# EAGLE board blinkmusb_b0_qfn (EAGLE 5.11)

Size 12.7 x 15.24 mm. Coordinates in mm from the lower left corner, seen from the top.
Outline: 0,0 12.7,0 12.7,15.24 0,15.24 0,0
Copper layers (1*16): Top 0.0356mm / dielectric 1.5011mm / Bottom 0.0356mm
Design rules "LaenPCBOrder *": minimum track width 8mil, minimum drill 13mil, track to track 6mil, track to pad 8mil, pad to pad 8mil, via to via 8mil, smd to smd 6mil, copper to edge 15mil, drill to drill 8mil, minimum pad ring 7mil, minimum via ring 7mil, stop-mask expansion 4mil, vias tented up to drill 0mil, thermal gap 10mil

## Footprints (pad centres in the part's own frame; a part is rotated, then mirrored left to right if it is on the bottom)
C0603 = smd 1.1 x 1: 1 -0.85,0; 2 0.85,0
SOD-323 = smd 0.63 x 0.83: 1 -1.15,0; 2 1.15,0
0603 = smd 1.1 x 1: 1 -0.85,0; 2 0.85,0
MLF20 = smd 0.9 x 0.35: 1 -2.25,1.3; 2 -2.25,0.65; 3 -2.25,0; 4 -2.25,-0.65; 5 -2.25,-1.3; 11 2.25,-1.3; 12 2.25,-0.65; 13 2.25,0; 14 2.25,0.65; 15 2.25,1.3 | smd 0.35 x 0.9: 6 -1.3,-2.25; 7 -0.65,-2.25; 8 0,-2.25; 9 0.65,-2.25; 10 1.3,-2.25; 16 1.3,2.25; 17 0.65,2.25; 18 0,2.25; 19 -0.65,2.25; 20 -1.3,2.25
RGBLED5050 = smd 2 x 1.1: 1 -2,1.7; 2 -2,0; 3 -2,-1.7; 4 2,-1.7; 5 2,0; 6 2,1.7
R0603 = smd 1 x 1.1: 1 -0.85,0; 2 0.85,0
MOLEX_480371000 = smd 1.2 x 2: 1 3.5,2.6; 2 1,2.6; 3 -1,2.6; 4 -3.5,2.6 | drill 2.5 round: M1 -5.7,0; M2 5.7,0 | hole 1.1: -2.25,0; 2.25,0

## Placement (x,y rotation side)
C1  [C0603]  9.65,11.68 180 top
C2  10uF  [C0603]  9.65,13.21 180 top
D1  3.6V  [SOD-323]  7.62,14.22 180 bottom
D2  3.6V  [SOD-323]  5.08,11.68 90 bottom
F1  PTC0603  [0603]  5.08,2.54 270 bottom
IC2  ATTINY45MLF  [MLF20]  8.89,7.37 0 bottom
LED1  RGBLED5050  [RGBLED5050]  8.89,7.62 90 top
R1  68  [R0603]  3.56,9.65 270 bottom
R2  68  [R0603]  3.56,6.1 90 bottom
R3  1k5  [R0603]  6.6,10.92 180 top
R4  100  [R0603]  9.14,2.54 90 top
R5  100  [R0603]  7.62,2.54 90 top
R6  60  [R0603]  10.67,2.54 90 top
X1  USB-A  [MOLEX_480371000]  2.03,7.62 270 top

## Library data of the parts
C1 C2 R1-R6 = rcl
D1 D2 F1 = SparkFun-20110517
IC2 = todstuff
LED1 X1 = adafruit-20120122

## Nets
BLU: IC2.12 R6.1
D+: IC2.2 R1.1
D-: IC2.14 R2.1
GND: C1.2 C2.2 D1.2 D2.2 IC2.8 LED1.4 LED1.5 LED1.6 X1.4
GRN: IC2.11 R5.1
N$4: D2.1 R1.2 X1.3
N$5: D1.1 R2.2 R3.2 X1.2
N$13: F1.1 X1.1
RBLU: LED1.3 R6.2
RED: IC2.5 R4.1
RGRN: LED1.1 R5.2
RRED: LED1.2 R4.2
RST: IC2.1
VCC: C1.1 C2.1 F1.2 IC2.15 R3.1

## Tracks (layer width: path | path; a pad name or v marks a point on that pad's centre or on a via)
BLU  (1 unrouted)
D+  (1 unrouted)
D-  (1 unrouted)
GND  (8 unrouted)
GRN  (1 unrouted)
N$4  (2 unrouted)
N$5  (3 unrouted)
N$13  (1 unrouted)
RBLU  (1 unrouted)
RED  (1 unrouted)
RGRN  (1 unrouted)
RRED  (1 unrouted)
VCC  (4 unrouted)

## Text on the board
tPlace: BlinkM USB | blinkmusb_b0 | blinkm.thingm.com